# EAGLE board Ping-Pong-Game- GROUP PROJECT (1) (EAGLE 9.7.0)

Size 214.37 x 140.19 mm. Coordinates in mm from the lower left corner, seen from the top.
Outline: 0,0 214.37,0 214.37,140.19 0,140.19 0,0
Copper layers (1*16): Top 0.035mm / dielectric 1.5mm / Bottom 0.035mm
Design rules "default": minimum track width 6mil, minimum drill 0.35mm, track to track 6mil, track to pad 6mil, pad to pad 6mil, via to via 6mil, smd to smd 6mil, copper to edge 40mil, drill to drill 6mil, minimum pad ring 10mil, minimum via ring 8mil, stop-mask expansion 4mil, vias tented up to drill 0mil, thermal gap 10mil

## Footprints (pad centres in the part's own frame; a part is rotated, then mirrored left to right if it is on the bottom)
WS2812B = smd 1.5 x 0.9: 1 -2.45,1.65; 2 -2.45,-1.65; 3 2.45,-1.65; 4 2.45,1.65
PIEZO = drill 1 pad 1.6: 1 -3.5,0; 2 3.5,0
RESAD1016W63L850D250B = drill 0.83 pad 1.43: 1 -5.08,0; 2 5.08,0
HA-06-SM065 = drill 1 pad 1.676: 1 -2.54,-2.54; 2 0,2.54; 3 2.54,-2.54
SWITCH-MOMENTARY-PTH-6.5MM = drill 1.016 pad 1.88: 1 -3.251,2.261; 2 3.251,2.261; 3 -3.251,-2.261; 4 3.251,-2.261
JHD-162A = drill 1.016 long: 1 -19.05,0; 2 -16.51,0; 3 -13.97,0; 4 -11.43,0; 5 -8.89,0; 6 -6.35,0; 7 -3.81,0; 8 -1.27,0; 9 1.27,0; 10 3.81,0; 11 6.35,0; 12 8.89,0; 13 11.43,0; 14 13.97,0; 15 16.51,0; 16 19.05,0
ARDUINO-UNO-R3-SHIELD = drill 1.016 pad 1.88: 3.3V 24.13,-2.54; 5V 24.13,0; A0 24.13,12.7; A1 24.13,15.24; A2 24.13,17.78; A3 24.13,20.32; A4 24.13,22.86; A5 24.13,25.4; AREF -24.13,-13.97; D2 -24.13,20.32; D3 -24.13,17.78; D4 -24.13,15.24; D5 -24.13,12.7; D6 -24.13,10.16; D7 -24.13,7.62; D8 -24.13,3.81; D9 -24.13,1.27; D10 -24.13,-1.27; D11 -24.13,-3.81; D12 -24.13,-6.35; D13 -24.13,-8.89; GND@0 24.13,2.54; GND@1 24.13,5.08; GND@2 -24.13,-11.43; IOREF 24.13,-7.62; NC 24.13,-10.16; RES 24.13,-5.08; RX -24.13,25.4; SCL -24.13,-19.05; SDA -24.13,-16.51; TX -24.13,22.86; VIN 24.13,7.62

## Placement (x,y rotation side)
LED1  WS2812B  [WS2812B]  135.88,11.64 270 top
LED2  WS2812B  [WS2812B]  206.84,11.48 270 top
PIEZO1  PIEZO  [PIEZO]  47.62,59.34 0 top
R1  10k  [RESAD1016W63L850D250B]  20.95,49.18 90 top
R2  10k  [RESAD1016W63L850D250B]  66.67,49.18 90 top
R3  10k  [RESAD1016W63L850D250B]  10.79,49.18 90 top
R4  10k  [RESAD1016W63L850D250B]  76.83,49.18 90 top
R5  220  [RESAD1016W63L850D250B]  48.9,36.48 90 top
R7  10k  [RESAD1016W63L850D250B]  176.68,6.33 0 top
RPOT1  10k  [HA-06-SM065]  28.57,56.8 0 top
S1  SWITCH_MOMENTARY  [SWITCH-MOMENTARY-PTH-6.5MM]  74.3,65.69 90 top
S2  SWITCH_MOMENTARY  [SWITCH-MOMENTARY-PTH-6.5MM]  64.14,65.69 90 top
S3  SWITCH_MOMENTARY  [SWITCH-MOMENTARY-PTH-6.5MM]  169.06,10.14 90 top
S4  SWITCH_MOMENTARY  [SWITCH-MOMENTARY-PTH-6.5MM]  18.41,65.69 90 top
S5  SWITCH_MOMENTARY  [SWITCH-MOMENTARY-PTH-6.5MM]  8.26,65.69 90 top
U1  LCD-16X2JHD-162A  [JHD-162A]  157.42,52.6 0 top
U3  ARDUINO-UNO-R3-SHIELD  [ARDUINO-UNO-R3-SHIELD]  171.65,110.35 270 top

## Library data of the parts
LED1 LED2 = Tinkercad; CATEGORY: LED; COLOR: RGB; DESCRIPTION: LED integrated light source; MANUFACTURER: Worldsemi; MPN: WS2812B; OPERATING_TEMP: -25 ℃ to +80℃(TJ); PART_STATUS: Active; SUB_CATEGORY: RGB
PIEZO1 R1-R5 R7 RPOT1 S1-S5 U1 U3 = Tinkercad

## Nets
U1_LED+: R5.1 U1.15
U1_VO: RPOT1.2 U1.3
U3_5V: LED1.1 LED2.1 R5.2 RPOT1.3 S1.1 S1.2 S2.1 S2.2 S3.1 S4.1 S4.2 S5.1 S5.2 U1.2 U3.5V
U3_D2: U1.14 U3.D2
U3_D3: U1.13 U3.D3
U3_D4: U1.12 U3.D4
U3_D5: U1.11 U3.D5
U3_D6: R3.2 S5.3 S5.4 U3.D6
U3_D7: R1.2 S4.3 S4.4 U3.D7
U3_D8: R2.2 S2.3 S2.4 U3.D8
U3_D9: R4.2 S1.3 S1.4 U3.D9
U3_D10: PIEZO1.1 U3.D10
U3_D11: U1.6 U3.D11
U3_D12: U1.4 U3.D12
U3_D13: R7.1 S3.3 S3.4 U3.D13
U3_GND: LED1.3 LED2.3 PIEZO1.2 R1.1 R2.1 R3.1 R4.1 R7.2 RPOT1.1 U1.1 U1.16 U3.GND@0 U3.GND@1 U3.GND@2
U3_RX: LED1.4 U3.RX
U3_TX: LED2.4 U3.TX

## Tracks (layer width: path | path; a pad name or v marks a point on that pad's centre or on a via)
U1_LED+  (1 unrouted)
U1_VO  (1 unrouted)
U3_5V  (14 unrouted)
U3_D2  (1 unrouted)
U3_D3  (1 unrouted)
U3_D4  (1 unrouted)
U3_D5  (1 unrouted)
U3_D6  (3 unrouted)
U3_D7  (3 unrouted)
U3_D8  (3 unrouted)
U3_D9  (3 unrouted)
U3_D10  (1 unrouted)
U3_D11  (1 unrouted)
U3_D12  (1 unrouted)
U3_D13  (3 unrouted)
U3_GND  (13 unrouted)
U3_RX  (1 unrouted)
U3_TX  (1 unrouted)